# Altium PCB Button3x4S-1_Pcb.PcbDoc
Units mil, origin at the board's own origin, x right, y up, seen from the top; angles counter-clockwise.
Board outline 400 x 300 mil, 2 copper layers (Top Layer, Bottom Layer); 8 components, 3 nets, 12 pads, 2 vias.
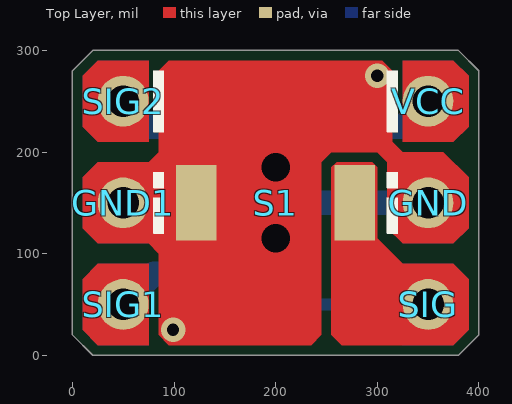
[diagram p0: Top Layer view]
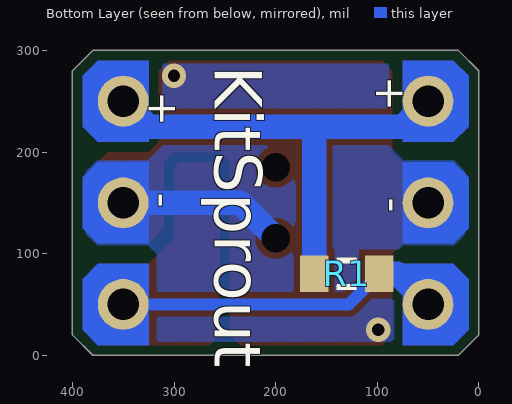
[diagram p1: Bottom Layer view, seen from below]

## Layer stack, top to bottom
Top Solder: solder mask 0.4, Solder Resist, Dk 3.5
Top Layer: signal copper 1.4
Dielectric1: dielectric 12.6, FR-4, Dk 4.8
Bottom Layer: signal copper 1.4
Bottom Solder: solder mask 0.4, Solder Resist, Dk 3.5

## Board outline
0,20 20,0 380,0 400,20 400,280 380,300 20,300 0,280

## Design rules (kind name [scope] priority, off if disabled: settings)
Clearance ClearancePolygon [InPolygon] p1: gap=6
Clearance [All] p2: gap=6
ComponentClearance [All] p1: gap=0 collisioncheckmode=3 verticalgap=0 showdistances=FALSE
Height [All] p1: minheight=0 maxheight=5000 prefheight=500
HoleToHoleClearance [All] p1: gap=6 allowstackedmicrovias=TRUE
MinimumSolderMaskSliver [All] p1: minsoldermaskwidth=6
PlaneConnect [All] p1: planeconnectstyle=Direct reliefexpansion=20 reliefentries=4 reliefconductorwidth=20 reliefairgap=10
PolygonConnect [All] p1: connectstyle=Direct reliefconductorwidth=20 reliefentries=4 polygonreliefangle="90 Angle" airgapwidth=10
RoutingVias [All] p1: holewidth=12 width=20 viastyle="Through Hole" minholewidth=12 minwidth=20 maxholewidth=100 maxwidth=200
SilkToSilkClearance [All] p1: silktosilkclearance=0
SilkToSolderMaskClearance SilkscreenOverComponentPads [IsPad] p1: minsilkscreentomaskgap=1 clearancetoexposedcopper=TRUE
SolderMaskExpansion [All] p1: expansion=0
Width [All] p1: maxlimit=30 minlimit=6 preferedwidth=10
22 further rules are at their usual default settings.

## Classes and differential pairs
component class Button3x4S-1_Sch: GND R1 S1 SIG VCC

## Components (designator, comment, footprint, x,y, rotation, side; value= is the part's Value field where it differs from the comment)
GND "HDR-PAD_2.54" HDR-PAD_2.54 350,150 r180 top
GND1 "HDR-PAD_2.54" HDR-PAD_2.54 50,150 r180 top (schematic designator GND)
R1 "Res_0603" RES_0603 130,80 r0 bottom
S1 "ButtonTACT_3x4x2_180" ButtonTACT_3x4x2_180H 200,150 r0 top locked
SIG "HDR-PAD_2.54" HDR-PAD_2.54 350,50 r0 top
SIG1 "HDR-PAD_2.54" HDR-PAD_2.54 50,50 r0 top (schematic designator SIG)
SIG2 "HDR-PAD_2.54" HDR-PAD_2.54 50,250 r0 top (schematic designator SIG)
VCC "HDR-PAD_2.54" HDR-PAD_2.54 350,250 r0 top

## Footprints (in the part's own frame and the unit in brackets; to place one, negate y for a bottom-side part, rotate by r counter-clockwise, add the part's x,y. Pads: shape width x height; smd on the part's side, far side on the other; paste and mask are expansions set on the pad)
ButtonTACT_3x4x2_180H [mil]
  round 0 hole 28: 0(0,-35) 0(0,35)
  rect 40x74 smd: 1(-78,0) 2(78,0)
  body extent -79,-49 79,49, height 63
HDR-PAD_2.54 [mil]
  round 50 hole 31: 1(0,0)
RES_0603 [mil]
  rect 28x36 smd: 1(-32,0) 2(32,0)
  silkscreen extent -10,-16 10,16, body extent -31,-16 32,16, height 20

## Part data
GND GND1 SIG SIG1 SIG2 VCC: "Header"
R1: "Resistor"
S1: "Button"

## Via types
v1: diameter 24, hole 12, Top Layer to Bottom Layer, 2 vias

## Nets (pads, with @x,y where several pads share a name; then routed paths per layer and width w, separated by ;. In a path a pad name is that pad's centre, name@x,y a point inside that pad or via, vN(x,y) a via of type N, cw(c..) or ccw(c..) an arc to the next point about the centre after c; other vN are vias at no path point)
GND: GND1.1 GND.1 S1.0 S1.1 | length 306.5
  Top Layer w24: GND1.1 S1.1 ; 200,115 200,185
  Bottom Layer w24: 200,115 235,150 GND.1
  other v1: 99.07,25 300,275
SIG: R1.1 S1.2 SIG1.1 SIG.1 | length 324.9
  Bottom Layer w12: R1.1 128,50 SIG.1
  Bottom Layer w24: SIG1.1 80,80 R1.1
VCC: R1.2 SIG2.1 VCC.1 | length 465.7
  Bottom Layer w24: SIG2.1 75,225 162,225 ; R1.2 162,225 ; VCC.1 325,225 162,225

## Polygon pours and split planes (outlines as drawn)
GND on Bottom Layer "Mechanical 1-No Net" (hatched 90Degree grid 2 track 4, remove dead copper, pour order 2): 25,285 15,275 15,265 15,195 15,25 25,15 130,15 375,15 385,25 385,105 385,275 375,285

## Other copper
Top Layer:
  region net SIG: 300,185 295,190 260,190 255,185 255,20 265,10 375,10 390,25 390,75 375,90 325,90 300,115
  region net GND: 25,190 10,175 10,125 25,110 75,110 85,100 85,20 95,10 235,10 245,20 245,190 255,200 300,200 310,190 310,125 325,110 375,110 390,125 390,175 365,200 325,200 315,210 315,280 305,290 95,290 85,280 85,200 75,190
Bottom Layer:
  pour cut-out: 375,10 315,10 315,100 325,110 375,110 390,125 390,25
  pour cut-out: 25,290 90,290 90,205 75,190 25,190 10,175 10,275
  pour cut-out: 310,290 375,290 390,275 390,175 375.07,190 325,190 310,205
  pour cut-out: 85,10 25,10 10,25 10,125 24.93,110 75,110 85,100
Multi-Layer:
  region net GND: 75,190 25,190 10,175 10,125 25,110 75,110
  region net SIG: 75,90 25,90 10,75 10,25 25,10 75,10
  region net SIG: 325,10 375,10 390,25 390,75 375,90 325,90
  region net GND: 325,110 375,110 390,125 390,175 375,190 325,190
  region net VCC: 325,210 375,210 390,225 390,275 375,290 325,290
  region net VCC: 75,290 25,290 10,275 10,225 25,210 75,210

## Silkscreen, mask and mechanical layers (free items; w line width, h text height)
Top Overlay:
  region: 310,180 320,180 320,165 310,165
  region: 310,155 320,155 320,120 310,120
  region: 320,220 310,220 310,280 320,280
  region: 80,180 90,180 90,165 80,165
  region: 80,155 90,155 90,120 80,120
  region: 80,280 90,280 90,220 80,220
  lines w1: 80,120 90,120 90,155 80,155 80,120 ; 80,165 80,180 90,180 90,165 80,165 ; 80,220 90,220 90,280 80,280 80,220 ; 310,120 320,120 320,155 310,155 310,120 ; 310,165 310,180 320,180 320,165 310,165 ; 310,220 310,280 320,280 320,220 310,220
Bottom Overlay:
  text "KitSprout" at 275,285 h80 r90
  text "+" at 325,260 h30 r90
  text "+" at 75,240 h30 r270
  text "-" at 325,160 h30 r90
  text "-" at 75,140 h30 r270
Top Solder:
  region: 75,190 25,190 10,175 10,125 25,110 75,110
  region: 75,90 25,90 10,75 10,25 25,10 75,10
  region: 325,10 375,10 390,25 390,75 375,90 325,90
  region: 325,110 375,110 390,125 390,175 375,190 325,190
  region: 325,210 375,210 390,225 390,275 375,290 325,290
  region: 75,290 25,290 10,275 10,225 25,210 75,210
Bottom Solder:
  region: 75,190 25,190 10,175 10,125 25,110 75,110
  region: 75,90 25,90 10,75 10,25 25,10 75,10
  region: 325,10 375,10 390,25 390,75 375,90 325,90
  region: 325,110 375,110 390,125 390,175 375,190 325,190
  region: 325,210 375,210 390,225 390,275 375,290 325,290
  region: 75,290 25,290 10,275 10,225 25,210 75,210
Mechanical 1:
  the board outline again, w2

## Dimensions
0,280 to 400,280 on Mechanical 13
380,300 to 380,0 on Mechanical 13